# EAGLE board working (EAGLE 7.5.0)
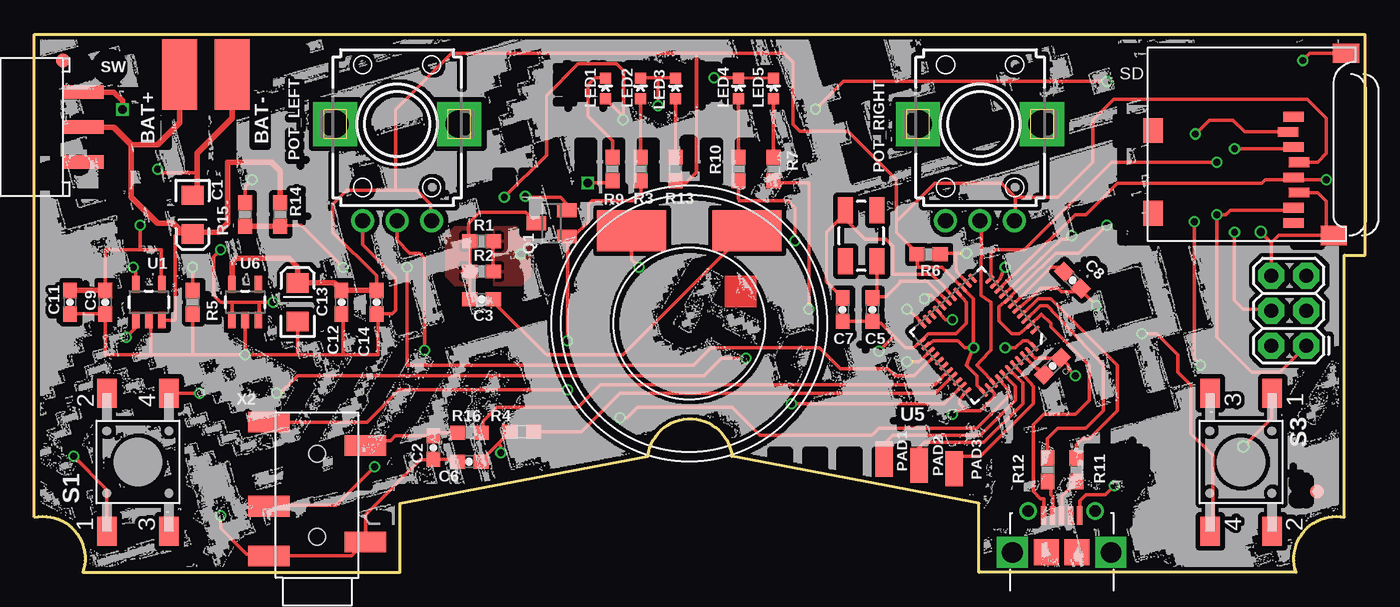
[diagram p0: board, top side]
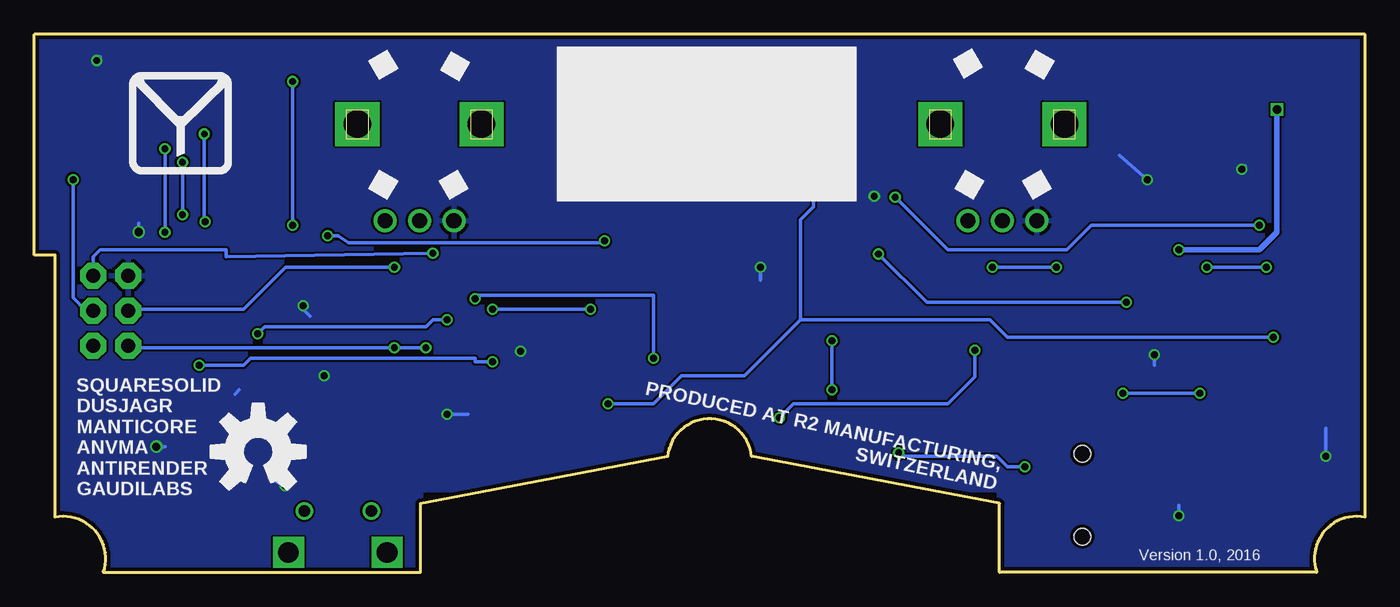
[diagram p1: board, bottom side, seen from below]

Size 96.5 x 39 mm. Coordinates in mm from the lower left corner, seen from the top.
Outline: 0,39 96.5,39 96.5,23 95,23 95,4 arc120 91.5,0 68.5,0 68.5,5 50.59,8.41 arc167 44.49,8.41 26.5,5 26.5,0 3.5,0 arc121 0,4 0,39
Copper layers (1*2*15*16): Top 0.035mm / dielectric 0.2mm / Route2 0.0175mm / dielectric 1.1mm / Route15 0.0175mm / dielectric 0.2mm / Bottom 0.035mm
Design rules "SeeedStudio_DRU_no_angle_20130527": minimum track width 6mil, minimum drill 12mil, track to track 6mil, track to pad 6mil, pad to pad 6mil, via to via 6mil, smd to smd 0mil, copper to edge 10mil, drill to drill 10mil, minimum pad ring 6mil, minimum via ring 6mil, stop-mask expansion 2mil, vias tented up to drill 25mil, thermal gap 10mil
Net classes: 0 Default: width 0.203 mm; 2 LEDPower: width 0.203 mm; 3 ButtonSignal: width 0.203 mm

## Footprints (pad centres in the part's own frame; a part is rotated, then mirrored left to right if it is on the bottom)
SMD2,54-5,08 = smd 2.54 x 5.08: 1 0,0
EIA3216 = smd 1.4 x 1.6: A 1.4,0; C -1.4,0
0603-CAP = smd 1.1 x 1: 1 -0.85,0; 2 0.85,0
2X3 = drill 1.016 pad 1.88 octagon: 1 0,0; 2 0,2.54; 3 2.54,0; 4 2.54,2.54; 5 5.08,0; 6 5.08,2.54
LED-0603 = smd 0.8 x 0.8: A 0,-0.75; C 0,0.75
SMD1,27-2,54 = smd 1.27 x 2.54: 1 0,0
EVUF = drill 1.1 pad 1.676: 1 -2.5,-7; 2 0,-7; 3 2.5,-7 | drill 2 pad 3.2 square: M1 4.5,0; M2 -4.5,0
SOT23 = smd 1 x 1.4: 1 -0.95,-1.1; 2 0.95,-1.1; 3 0,1.1
0603-RES = smd 1.1 x 1: 1 -0.85,0; 2 0.85,0
TASTER-9314_SMD = smd 2.1 x 1.4: 1 -5,2.25; 2 5,2.25; 3 -5,-2.25; 4 5,-2.25
MICROSD = smd 0.7 x 1.5: 1 9,-10.64; 2 7.9,-10.24; 3 6.8,-10.64; 4 5.7,-11.04; 5 4.6,-10.64; 6 3.5,-11.04; 7 2.4,-10.64; 8 1.3,-10.64 | smd 1.8 x 1.4: CD1 2,-0.44; CD2 8,-0.44 | smd 1.4 x 1.9: MT1 0.4,-13.54; MT2 13.6,-14.44
PS603 = smd 5 x 3: 1 -4.184,-6.738; 2 4.184,-6.738
SWITCH_SMD = smd 3 x 1: COM 0,0; S1 0,2.54; S2 0,-2.54
SOT23-5 = smd 0.55 x 1.2: 1 -0.95,-1.3; 2 0,-1.3; 3 0.95,-1.3; 4 0.95,1.3; 5 -0.95,1.3
QFN-44-NOPAD_1:1 = smd 0.8 x 0.3: 1 -3.337,2.458; 2 -3.337,1.958; 3 -3.337,1.479; 4 -3.337,0.979; 5 -3.337,0.5; 6 -3.337,0; 7 -3.337,-0.5; 8 -3.337,-0.979; 9 -3.337,-1.479; 10 -3.337,-1.958; 11 -3.337,-2.458; 23 3.337,-2.458; 24 3.337,-1.958; 25 3.337,-1.479; 26 3.337,-0.979; 27 3.337,-0.5; 28 3.337,0; 29 3.337,0.5; 30 3.337,0.979; 31 3.337,1.479; 32 3.337,1.958; 33 3.337,2.458 | smd 0.3 x 0.8: 12 -2.458,-3.337; 13 -1.958,-3.337; 14 -1.479,-3.337; 15 -0.979,-3.337; 16 -0.5,-3.337; 17 0,-3.337; 18 0.5,-3.337; 19 0.979,-3.337; 20 1.479,-3.337; 21 1.958,-3.337; 22 2.458,-3.337; 34 2.458,3.337; 35 1.958,3.337; 36 1.479,3.337; 37 0.979,3.337; 38 0.5,3.337; 39 0,3.337; 40 -0.5,3.337; 41 -0.979,3.337; 42 -1.479,3.337; 43 -1.958,3.337; 44 -2.458,3.337
FIDUCIAL_1MM = smd 1 x 1: 1 0,0
USB_B_SMD = smd 0.4 x 1.35: D+ 0,0; D- -0.65,0; GND 1.3,0; ID 0.65,0; VCC -1.3,0 | smd 1.8 x 1.9: P$6 -1.1,-2.675; P$7 1.1,-2.675 | drill 0.85: P$8 -2.425,0.325; P$9 2.425,0.325 | drill 1.5 pad 2 square: P$10 -3.575,-2.675; P$11 3.575,-2.675
PJ-327A = smd 1.5 x 3: 1 2.6,-3.5; 2 9.6,-3.5; 3 5.2,3.5; 4 11.3,3.5; 5 1.6,3.5 | hole 1.2: 3,0; 9,0
CRYSTAL-SMD-5X3 = smd 1.9 x 1.1: 1 -1.85,-1.15; 2 1.85,-1.15; 3 1.85,1.15; 4 -1.85,1.15

## Placement (x,y rotation side)
BAT+  [SMD2,54-5,08]  10.52,36.1 0 top
BAT-  [SMD2,54-5,08]  14.33,36.1 0 top
C1  10uF  [EIA3216]  11.47,25.94 270 top
C2  1uF  [0603-CAP]  28.93,9.05 90 top
C3  1uF  [0603-CAP]  32.42,19.8 180 top
C4  0.1uF  [0603-CAP]  73.83,14.95 225 top
C5  22pF  [0603-CAP]  60.77,19.05 270 top
C6  1uF  [0603-CAP]  31.54,8.03 0 top
C7  22pF  [0603-CAP]  58.61,19.05 270 top
C8  1uF  [0603-CAP]  75.28,21.18 135 top
C9  4.7uF  [0603-CAP]  5.12,19.59 270 top
C11  1uF  [0603-CAP]  2.58,19.59 90 top
C12  1uF  [0603-CAP]  22.27,19.59 270 top
C13  10uF  [EIA3216]  19.09,19.59 90 top
C14  0.1uF  [0603-CAP]  24.8,19.59 90 top
JP4  AVR_SPI  [2X3]  92.25,16.44 90 top
LED1  Yellow  [LED-0603]  41.41,35.09 0 top
LED2  Blue  [LED-0603]  43.95,35.09 0 top
LED3  Green  [LED-0603]  46.49,35.09 0 top
LED4  Red  [LED-0603]  51.06,35.09 0 top
LED5  Yellow  [LED-0603]  53.6,35.09 0 top
LOGO1  OSHW-LOGOL  [OSHW-LOGO-L]  80.28,8.75 0 bottom
PAD1  WIREPADSMD1,27-254  [SMD1,27-2,54]  61.64,8.22 0 top
PAD2  WIREPADSMD1,27-254  [SMD1,27-2,54]  64.17,7.78 0 top
PAD3  WIREPADSMD1,27-254  [SMD1,27-2,54]  66.72,7.53 0 top
POT_LEFT  EVUF2A  [EVUF]  26.3,32.5 0 top
POT_RIGHT  EVUF2A  [EVUF]  68.58,32.5 0 top
Q1  BSS123  [SOT23]  37.51,25.3 90 top
R1  33  [0603-RES]  32.42,24 0 top
R2  33  [0603-RES]  32.42,21.81 0 top
R3  330  [0603-RES]  43.95,29.25 270 top
R4  330  [0603-RES]  35.35,10.19 0 top
R5  2K  [0603-RES]  11.47,19.59 270 top
R6  10K  [0603-RES]  64.84,23.06 180 top
R7  330  [0603-RES]  53.6,29.25 90 top
R9  470  [0603-RES]  41.92,29.25 90 top
R10  330  [0603-RES]  51.06,29.25 90 top
R11  22  [0603-RES]  75.57,7.45 270 top
R12  22  [0603-RES]  73.49,7.45 270 top
R13  330  [0603-RES]  46.49,29.25 270 top
R14  10k  [0603-RES]  17.82,25.94 90 top
R15  10k  [0603-RES]  15.28,25.94 270 top
R16  330  [0603-RES]  31.54,10.13 0 top
S1  Left  [TASTER-9314_SMD]  7.5,8 90 top
S3  Right  [TASTER-9314_SMD]  87.5,8 270 top
SD  MICROSD  [MICROSD]  80.69,24.04 90 top
SPEAKER  PS603SPK  [PS603]  47.5,18.04 180 top
SW  SWITCH_SMD  [SWITCH_SMD]  3.53,32.29 0 top
U1  MCP73831  [SOT23-5]  8.29,19.59 0 top
U5  ATMEGA32U4  [QFN-44-NOPAD_1:1]  68.44,17.18 222 top
U6  MIC5219-3.3  [SOT23-5]  15.28,19.59 0 top
U$1  FIDUCIAL  [FIDUCIAL_1MM]  2.07,37.12 0 top
U$2  FIDUCIAL  [FIDUCIAL_1MM]  93,5.87 0 top
U$4  FIO_LOGOV2  [FUNNEL_LOGO_BOTTOM_V2]  85.89,32.54 0 top
X1  USB_B_SMD  [USB_B_SMD]  74.5,4.13 0 top
X2  PJ-327A  [PJ-327A]  20.5,-0.4 90 top
Y2  8MHz  [CRYSTAL-SMD-5X3]  59.96,24.4 270 top

## Library data of the parts
BAT+ BAT- PAD1-PAD3 = wirepad
C1 C13 JP4 LED1-LED5 U1 U6 U$4 Y2 = SparkFun
C2-C9 C11 C12 C14 = SparkFun-Capacitors
LOGO1 = SparkFun-Aesthetics
POT_LEFT POT_RIGHT SW X1 X2 = Gaudi
Q1 = transistor-small-signal
R1-R7 R9-R16 = SparkFun-Resistors
S1 S3 = Gaudi; PN: UG_SW
SD SPEAKER U$1 U$2 = adafruit
U5 = Testing

## Nets
3.3V [vcc]: C12.1 C13.A C14.2 JP4.2 POT_LEFT.3 POT_RIGHT.3 R6.2 R13.2 SD.4 U5.14 U5.24 U5.34 U5.44 U6.5
A0: POT_RIGHT.2 U5.36
A1: POT_LEFT.2 U5.37
A2: PAD1.1 U5.38
A3: PAD2.1 U5.39
A4: PAD3.1 U5.40
A5: U5.41
AREF: C4.2 U5.42
CHARGE_STAT: R9.1 U1.1 U5.32
D2: S3.4 U5.19
D3: S1.4 U5.18
D4: SD.2 U5.25
D5: U5.31
D6: U5.27
D7: U5.1
D8: U5.28
D9: R16.2 U5.29
D10: R4.2 U5.30
D11: U5.12
D14: R10.1 U5.8
D+: R11.1 U5.4
D-: R12.1 U5.3
GND: BAT-.1 C1.C C2.1 C4.1 C5.2 C6.1 C7.2 C8.1 C9.2 C11.1 C12.2 C13.C C14.1 JP4.6 LED2.C LED3.C LED4.C LED5.C POT_LEFT.1 POT_RIGHT.1 Q1.2 R5.2 R15.1 S1.1 S3.1 SD.6 SD.MT1 SD.MT2 SPEAKER.2 U1.2 U5.5 U5.15 U5.23 U5.33 U5.35 U5.43 U6.2 X1.GND X2.1 X2.5
MISO: JP4.1 SD.7 U5.11
MOSI: JP4.4 SD.3 U5.10
N$2 [vcc]: C3.2 Q1.3 R1.1 R2.1
N$3: C3.1 SPEAKER.1
N$4: C6.2 R4.1 X2.3
N$5: R11.2 X1.D+
N$6: LED2.A R3.1
N$7: Q1.1 R3.2 X2.4
N$8: LED1.C R9.2
N$11: R5.1 U1.5
N$15: LED5.A R7.2
N$16: C7.1 U5.16 Y2.1
N$17: C5.1 U5.17 Y2.3
N$19: LED4.A R10.2
N$20: R12.2 X1.D-
N$21: C2.2 R16.1 X2.2
N$38: LED3.A R13.1
RAW [vcc]: R1.2 R2.2 SW.S1 U6.1 U6.3
RST: JP4.5 R6.1 U5.13
RXI: U5.20
SCK: JP4.3 SD.5 U5.9
TXLED: R7.1 U5.22
TXO: U5.21
UCAP: C8.2 U5.6
USB_VCC: C9.1 C11.2 LED1.A U1.4 U5.2 U5.7 X1.VCC
VBATT: BAT+.1 C1.A R14.2 SW.COM U1.3
VBATT_LVL: R14.1 R15.2 U5.26

## Tracks (layer width: path | path; a pad name or v marks a point on that pad's centre or on a via)
3.3V  (via drill 0.5)
  Top 0.2: 91.74,29.75 SD.4
  Top 0.254: 68.11,16.34 v68.11,16.29 67.48,16.29 66.97,16.8 65.19,16.8 U5.24 | 68.11,16.34 68.11,19.85 U5.14 65.83,22.13 64.05,22.13 64.05,23 R6.2 63.8,22.89 63.8,23.4 62.52,24.67 62.52,25.43 | 68.11,16.34 67.6,15.02 68.37,14.26 68.37,13.57 U5.34 | 62.52,25.43 65.32,28.23 70.14,28.23 71.16,27.21 | 71.16,27.21 71.16,25.58 POT_RIGHT.3 | 62.52,25.43 62.52,28.48 59,32 55.5,32 55,32.5 55,37 54.38,37.62 48,37.62 | v70.4,16.29 71.16,16.29 71.67,16.8 72.06,16.8 U5.44 | 71.16,27.21 74.21,27.21 76.75,29.75 76.75,32.8 78.27,34.32 92.31,34.32 93.7,32.92 93.7,30.38 93.07,29.75 91.74,29.75 | 48,37.62 30.27,37.62 26.2,33.56 26.2,27.72 | C14.2 24.8,21.5 21.63,24.67 21.63,26.7 22.65,27.72 26.2,27.72 | 26.2,27.72 27.73,27.72 28.74,26.7 28.74,25.56 POT_LEFT.3 | R13.2 46.66,28.23 47.25,28.23 48.01,29 48.01,37.61 48,37.62
  Top 0.406: U6.5 14.33,22.45 14.64,22.77 18.45,22.77 19.09,22.13 C13.A 21.71,20.99 C12.1 C14.2
  Bottom 0.254: v68.11,16.29 v70.4,16.29 89.56,16.29 JP4.2
A0
  Top 0.254: U5.36 68.94,14.44 68.37,15.02 68.59,15.31 69.38,16.1 69.38,19.59 68.65,20.1 68.66,25.46 POT_RIGHT.2
A1  (via drill 0.5)
  Top 0.254: U5.37 70.46,13.43 70.65,13.24 70.65,12.73 68.37,10.45 61.25,10.45 60.75,9.94 52.62,9.94 50.59,11.97 43.73,11.97 42.97,11.21 v42.46,11.21 | POT_LEFT.2 26.3,24.06 27.22,23.15 27.92,23.15 28.3,22.77 v28.3,16.1
  Bottom 0.254: v28.3,16.1 28.3,14.19 30.27,12.22 41.44,12.22 v42.46,11.21
A2
  Top 0.254: U5.38 70.31,14.35 71.16,13.49 71.16,12.48 68.62,9.94 62.27,9.94 61.76,9.43 61.76,7.65 PAD1.1
A3
  Top 0.254: U5.39 71.22,14.2 71.67,13.75 71.67,12.22 68.87,9.43 64.56,9.43 64.05,8.92 64.05,7.65 PAD2.1
A4
  Top 0.254: U5.40 71.56,14.49 72.43,13.49 72.43,12.22 68.62,8.41 66.84,8.41 66.59,8.16 PAD3.1
AREF
  Top 0.254: U5.42 71.78,15.67 72.68,14.76 72.82,14.76 C4.2
CHARGE_STAT  (via drill 0.5, 0.6)
  Top 0.254: 67.02,13.29 U5.32 66,12.22 v54.9,12.22 | U1.1 7.35,17.75 v6.64,17.05 | v40.14,28.23 41.62,28.23 R9.1
  Bottom 0.254: v6.64,17.05 25.95,17.05 27.22,18.32 40.93,18.32 | 40.93,18.32 40.93,25.57 40,26.5 40,28.09 v40.14,28.23 | 40.93,18.32 45,14.26 49.57,14.26 51.6,12.22 v54.9,12.22
D2  (via drill 0.5)
  Top 0.254: U5.19 65.99,18.41 66.08,18.32 v66.59,18.32 | S3.4 85.45,3.2 85.45,8.48 83.86,10.06 83.86,13.56 82.91,14.51 82.91,15.78 81.38,17.3 v80.3,17.3
  Bottom 0.254: v66.59,18.32 67.6,18.32 68.11,17.81 79.8,17.81 v80.3,17.3
D3  (via drill 0.5)
  Top 0.254: U5.18 65.59,19.57 65.06,20.1 64.81,20.1 v64.56,19.84 | S1.4 v11.98,12.99 | v51.6,15.53 49.82,15.53 48.55,14.26 19.09,14.26 17.82,12.99 v17.57,12.99
  Bottom 0.254: v51.6,15.53 51.6,20.1 64.3,20.1 v64.56,19.84 | v11.98,12.99 v17.57,12.99
D4  (via drill 0.5)
  Top 0.254: U5.25 64.72,15.82 64.17,15.27 v63.29,15.27 | SD.2 87.77,31.94 86.91,32.8 85.19,32.8 v84.18,31.78 | v84.11,25.43 84.11,15.53 v84.56,15.02
  Bottom 0.254: v63.29,15.27 64.56,15.27 64.56,15.53 80.81,15.53 81.32,15.02 v84.56,15.02 | v84.18,31.78 84.18,25.5 v84.11,25.43
D9
  Top 0.254: U5.29 66.25,14.58 65.29,13.62 41.06,13.62 39.41,11.97 33.57,11.97 32.55,10.95 32.55,10.29 R16.2
D10
  Top 0.254: 66.58,14.23 U5.30 66.59,14.23 65.35,12.99 42.46,12.99 39.66,10.19 R4.2
D14  (via drill 0.5)
  Top 0.254: U5.8 70.95,20.78 74.46,24.16 74.97,24.16 v75.22,24.42 | v55.16,24.04 55.16,26.45 54.65,26.96 51.19,26.96 | 51.19,26.96 51.1,26.96 | R10.1 51.06,27.08 51.19,26.96
  Bottom 0.254: v75.22,24.42 74.46,24.42 73.7,23.91 55.16,23.91 v55.16,24.04
D+
  Top 0.254: U5.4 72.47,19.5 72.81,19.84 73.7,19.84 78.53,15.02 78.53,11.72 76.49,9.68 75.99,9.68 75.58,9.27 R11.1
D-
  Top 0.254: U5.3 71.92,18.32 72.94,19.34 73.45,19.34 77.51,15.02 77.51,11.72 76.24,10.45 74.21,10.45 73.45,9.68 73.45,8.34 R12.1 73.51,8.32
GND  (via drill 0.5, 0.6)
  Top 0.254: U5.43 72.58,15.51 72.68,15.53 74.41,15.53 C4.1 | U5.5 72.18,19.84 72.94,20.61 74.21,20.61 74.46,20.35 75.65,20.35 C8.1 75.88,20.46 v77,19.34 | U5.15 67.32,19.87 67.6,19.59 67.6,18.07 66.84,17.3 64.85,17.3 U5.23 64.28,16.78 63.79,16.29 63.16,16.29 62.3,17.14 | C4.1 | U5.33 67.36,12.87 67.1,12.48 67.1,12.22 67.6,11.72 | 67.6,11.72 68.62,11.72 69.64,12.73 69.64,12.98 U5.35 | SD.MT1 93.7,24.43 | 93.7,24.43 90.25,24.43 89.71,23.9 | 89.7,23.15 JP4.6 89.71,23.9 | POT_LEFT.1 23.8,23.77 26.2,21.37 26.2,18.99 25.95,18.74 C14.1 24.93,18.61 24.93,15.78 22.39,15.78 | C11.1 C9.2 5.12,15.78 8.42,15.78 | R5.2 11.47,15.78 | 11.47,15.78 8.42,15.78 | 8.42,15.78 8.42,18.16 U1.2 | 11.47,15.78 v15.28,15.78 | v15.28,15.78 U6.2 | v15.28,15.78 19.09,15.78 | 19.09,15.78 C13.C | 19.09,15.78 22.39,15.78 | 22.39,15.78 22.39,18.61 C12.2 | C1.C 11.74,27.61 11.74,29 11.72,28.99 9.18,28.99 v8.93,29.24 | R15.1 15.28,27.97 v15.79,28.48 | 67.6,11.72 66.84,11.72 v66.59,11.46 | C7.2 C5.2 60.9,18.07 61.38,18.07 62.3,17.14 | LED5.C v49.28,35.85 51.05,35.85 LED4.C | S1.1 5.25,6 v2.83,8.41 | v45.22,33.82 45.22,35.85 | 45.22,35.85 46.48,35.85 LED3.C | 45.22,35.85 43.96,35.85 LED2.C | C4.1 74.97,15.02 74.97,14.76 v75.48,14.26 | 62.3,17.14 62.3,17.08 v61.25,16.03 | SD.MT2 92.51,37.63 v91.99,37.12 | SD.6 93.06,27.54 93.7,26.89 93.7,24.43 | S3.1 89.75,11.19 v87.67,9.11 | 89.71,23.9 v88.94,24.67 | SPEAKER.2 43.32,22.67 v43.85,22.13 | Q1.2 38.6,26.75 38.14,27.21 35.66,27.21 v35.6,27.27 | 23,1.6 X2.1 | 16.4,1.44 X2.5 23,1.2 X2.1 | 16.4,1.44 16,1.6 | X2.1 24,4.18 27.98,8.16 28.89,8.16 C2.1 30.52,8.2 C6.1 | v78.33,6.29 77.66,5.62 76.24,5.62 75.8,5.18 X1.GND
  Top 0.254: v13.5,4.1 13.5,3.21 15.41,1.3 16.26,1.3 16.4,1.44
  Top 0.406: C1.C 11.79,27.66 11.79,30.38 14.33,32.92 BAT-.1
  Bottom 0.254: v77,19.34 77,19.08 76.49,18.57 | v61.25,16.03 61.25,15.78 | v91.99,37.12 91.73,37.37 | v8.93,29.24 8.68,29.5 | v15.79,28.48 17.82,30.26 | v2.83,8.41 2.83,10.45 | v15.28,15.78 15.28,15.02 | v66.59,11.46 65.06,11.46 | v49.28,35.85 49.5,35.16 49.82,34.83 | v87.67,9.11 87.03,9.11 | v88.94,24.67 88.94,25.3 | 81.95,12.92 81.64,13.24 | v43.85,22.13 43.85,21.18 | v78.33,6.29 79.48,6.83 | v13.5,4.1 13.5,4.86
  pour Bottom: 0,0 0,39 96.5,39 96.5,23 95,23 95,0 68.5,0 68.5,6 26.5,6 26.5,0
MISO  (via drill 0.5)
  Top 0.254: U5.11 69.38,21.37 69.38,23.15 69.64,23.4 71.8,23.4 78.14,29.75 v85.77,29.75 | JP4.1 90.32,14.51 88.31,14.51 85.77,17.05 v85.77,25.94 86.4,25.94 86.72,26.26 91.15,26.26 SD.7
  Bottom 0.254: v85.77,25.94 v85.77,29.75
MOSI  (via drill 0.5)
  Top 0.254: U5.10 70.03,21.25 v70.4,22.13 | v87.03,24.67 87.03,19.72 87.67,19.08 89.61,19.08 JP4.4 | v87.03,30.7 91.19,30.7 SD.3
  Bottom 0.254: JP4.4 89.61,19.08 81.32,19.08 78.27,22.13 v70.4,22.13 | v87.03,24.67 v87.03,30.7
N$2
  Top 0.254: C3.2 R2.1 R1.1 31.47,24.11 31.47,25.3 32.28,26.11 35.6,26.11 Q1.3
  Top 0.406: Q1.3 35.92,25.3
  pour Top: 31.47,24.99 30.52,24.99 29.88,24.35 29.88,21.5 30.52,20.86 31.47,20.86
N$3
  Top 0.254: SPEAKER.1 42.69,15.78 37.12,15.78 33.27,19.63 C3.1
N$4  (via drill 0.5)
  Top 0.254: 17.17,5.37 X2.3 17.06,4.86 21.88,4.86 v24.68,7.65 | C6.2 32.39,8.08 33.65,9.35 | 33.65,9.35 R4.1 | v33.82,8.67 33.82,9.18 33.65,9.35
  Bottom 0.254: v24.68,7.65 25.95,7.65 26.71,8.41 33.57,8.41 v33.82,8.67
N$5
  Top 0.254: X1.D+ 74.5,5.52 R11.2
N$6
  Top 0.254: LED2.A R3.1
N$7  (via drill 0.5)
  Top 0.254: v38.65,13.24 26.46,13.24 24.12,10.9 X2.4 | v38.65,16.8 38.65,24.31 Q1.1 39.09,24.36 40.17,25.43 40.17,26.7 40.43,26.96 43.47,26.96 43.98,27.46 43.98,28.37 R3.2
  Bottom 0.254: v38.65,13.24 v38.65,16.8
N$8
  Top 0.254: 41.16,35.85 41.65,35.85 LED1.C 41.4,35.85 40.65,35.85 40.14,35.35 40.14,33.06 41.92,31.28 R9.2
N$11  (via drill 0.5)
  Top 0.254: U1.5 7.35,22.07 v7.15,22.13 | v11.47,22.13 R5.1
  Top 0.406: U1.5 7.35,21.18
  Bottom 0.254: v7.15,22.13 v11.47,22.13
N$15
  Top 0.254: LED5.A R7.2
N$16
  Top 0.254: Y2.1 58.81,26.04 58.59,25.81 | 58.59,25.81 57.44,24.67 57.44,21.07 C7.1 | U5.16 65.95,20.74 65.06,21.62 62.27,21.62 62.27,23.65 61.76,24.16 60.24,24.16 58.59,25.81
N$17
  Top 0.254: Y2.3 61.11,20.24 C5.1 60.84,19.97 61.76,19.97 62.78,20.99 62.78,21.11 64.76,21.11 U5.17
N$19
  Top 0.254: LED4.A R10.2
N$20
  Top 0.254: 73.51,6.58 R12.2 73.7,6.38 73.7,5.62 73.85,5.47 X1.D-
N$21
  Top 0.254: R16.1 29.16,10.13 C2.2 26.16,9.9 25.82,9.56 24.36,9.56 X2.2
N$38
  Top 0.254: LED3.A R13.1
RAW  (via drill 0.5, 0.6)
  Top 0.254: U6.1 14.33,19.52 14.26,19.59 | 14.26,19.59 16.3,19.59 | 16.3,19.59 16.3,18.36 U6.3 | 14.26,19.59 13.5,19.59 12.99,20.1 12.99,22.89 v13.5,23.4 | 16.3,19.59 v17.31,19.59 | R1.2 R2.2
  Top 0.406: v6.39,33.56 6.39,34.2 5.76,34.83 SW.S1
  Bottom 0.254: v17.31,19.59 31.79,19.59 v35.28,23.08
  Bottom 0.406: v13.5,23.4 7.66,23.4 6.39,24.67 v6.39,33.56
  pour Top: 33.38,24.99 33.38,20.86 35.28,20.86 35.92,21.5 35.92,24.04 34.97,24.35 34.97,24.99
RST  (via drill 0.5)
  Top 0.254: U5.13 66.91,21.81 66.84,22.13 66.84,23.14 | 66.84,23.14 66.84,23.15 v67.6,23.15 | 66.84,23.14 65.77,23.14 R6.1
  Bottom 0.254: v67.6,23.15 82.59,22.89 82.59,23.4 91.73,23.4 92.24,22.89 JP4.5
SCK  (via drill 0.5)
  Top 0.254: U5.9 70.31,20.9 75.48,25.94 76.24,25.94 78.53,28.23 89,28.23 89.26,28.48 91.17,28.48 SD.5 91.48,28.48 v93.7,28.48
  Bottom 0.254: JP4.3 92.78,18.98 93.7,19.91 v93.7,28.48
TXLED  (via drill 0.5)
  Top 0.254: U5.22 63.97,18.53 v63.29,19.08 | v56.17,19.08 56.17,27.72 56.16,28.23 53.64,28.23 R7.1
  Bottom 0.254: v63.29,19.08 v56.17,19.08
UCAP
  Top 0.254: U5.6 71.75,20.18 73.7,22.13 74.33,22.13 C8.2
USB_VCC  (via drill 0.5)
  Top 0.254: C9.1 5.12,23.4 7.66,23.4 | U1.4 9.18,20.95 9.18,23.4 7.66,23.4 | v77.76,25.18 75.73,23.15 74.08,23.15 70.98,20.17 U5.7 69.95,19.27 69.95,18.25 70.91,17.3 71.41,17.3 U5.2 73.04,18.73 73.7,18.07 73.7,17.81 76.49,15.02 76.49,12.48 75.48,11.46 73.19,11.46 72.43,10.7 72.43,5.87 72.95,5.36 73.2,5.36 X1.VCC | v77.76,35.59 58.67,35.59 v56.65,33.57 | LED1.A 42.68,33.07 v42.68,32.81 42.71,32.84 42.71,36.35 42.2,36.86 39.41,36.86 37.12,34.58 37.12,30.26 v34.08,27.21 | 7.66,23.4 v7.66,25.18
  Top 0.406: C11.2 C9.1
  Bottom 0.254: v77.76,25.18 v77.76,35.59 | v42.68,32.81 55.89,32.81 v56.65,33.57 | v7.66,25.18 19.85,25.18 21.63,23.4 30.27,23.4 v34.08,27.21
VBATT
  Top 0.254: U1.3 10.17,18.29 10.2,18.32 10.2,24.42 10.32,24.54 10.84,24.54 C1.A
  Top 0.406: R14.2 17.82,29.11 17.18,29.75 14.01,29.75 14.01,25.3 13.38,24.67 11.6,24.67 C1.A | SW.COM 5.76,32.29 7.03,31.02 | 7.03,31.02 7.03,27.21 8.93,25.3 10.07,25.3 10.84,24.54 | 7.03,31.02 8.93,31.02 10.52,32.61 BAT+.1
VBATT_LVL  (via drill 0.5)
  Top 0.254: U5.26 64.58,15.05 63.79,14.26 62.4,14.26 61.89,14.76 58.46,14.76 56.94,16.29 49.06,16.29 47.79,15.02 27.03,15.02 v27.03,22.13 | R14.1 18.84,25.18 19.34,25.18 v22.39,22.13
  Top 0.406: R15.2 R14.1
  Bottom 0.254: v22.39,22.13 v27.03,22.13
(copper drawn outside any net)
  shapes: Top area x1

## Text on the board
bPlace: PRODUCED AT R2 MANUFACTURING, / SWITZERLAND | SQUARESOLID / DUSJAGR / MANTICORE / ANVMA / ANTIRENDER / GAUDILABS | Version 1.0, 2016